# EAGLE board particle-can-v2.2 (EAGLE 7.5.0)
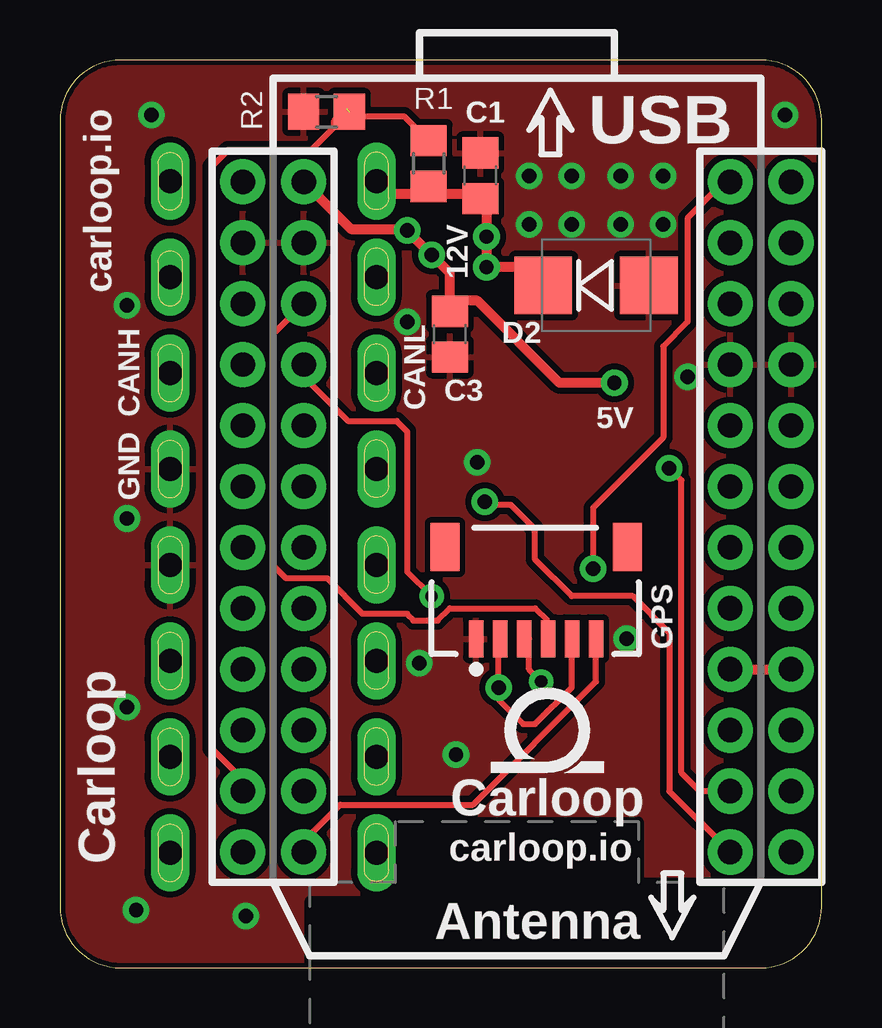
[diagram p0: board, top side]
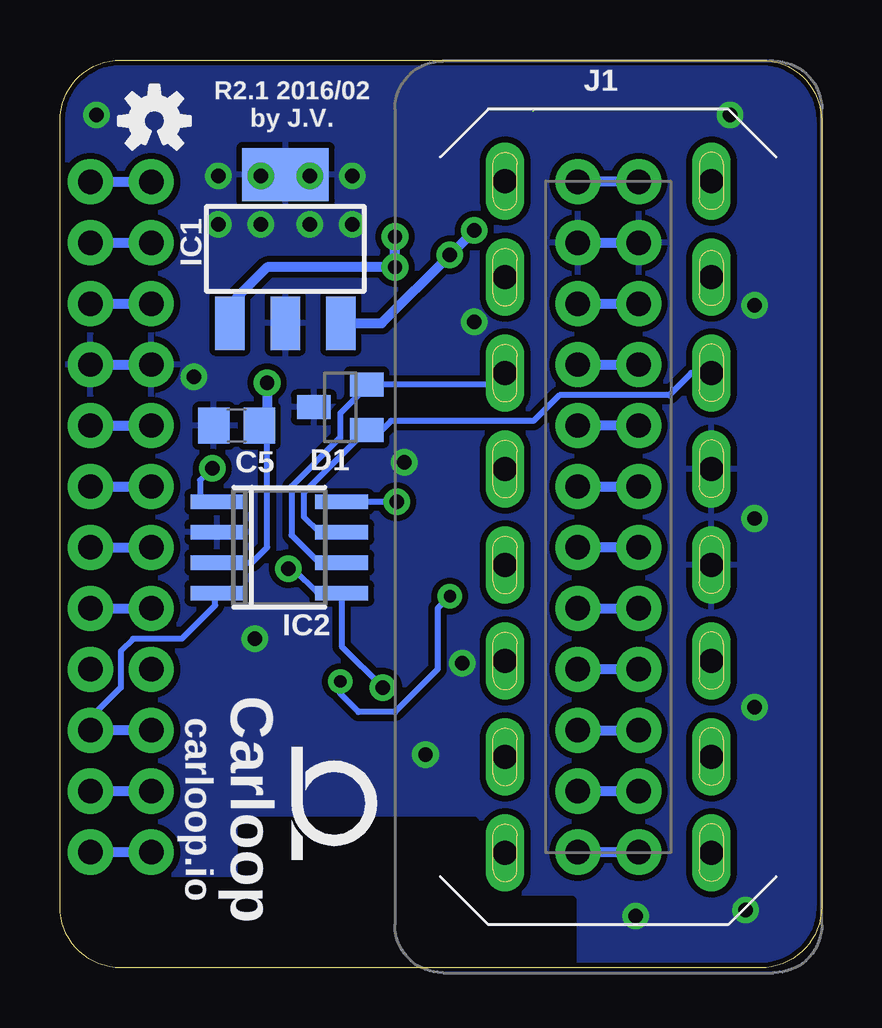
[diagram p1: board, bottom side, seen from below]

Size 31.75 x 37.85 mm. Coordinates in mm from the lower left corner, seen from the top.
Outline: 29.21,37.85 2.54,37.85 arc90 0,35.31 0,2.54 arc90 2.54,0 29.21,0 arc90 31.75,2.54 31.75,35.31 arc90 29.21,37.85
Copper layers (1*16): Top 0.035mm / dielectric 1.5mm / Bottom 0.035mm
Design rules "SparkFun *": minimum track width 8mil, minimum drill 20mil, track to track 10mil, track to pad 8mil, pad to pad 10mil, via to via 10mil, smd to smd 10mil, copper to edge 8mil, drill to drill 8mil, minimum pad ring 12mil, minimum via ring 10mil, stop-mask expansion 4mil, vias tented up to drill 45mil, thermal gap 10mil
Net classes: 0 default: width 0.254 mm; 1 power: width 0.813 mm, clearance 0.406 mm
tRestrict: area 10.4,-3 to 27.4,6.1
bRestrict: area 10.4,-3 to 27.4,6.1

## Footprints (pad centres in the part's own frame; a part is rotated, then mirrored left to right if it is on the bottom)
C0805 = smd 1.3 x 1.5: 1 -0.95,0; 2 0.95,0
PHOTON_STACKABLE_EXTERNAL = drill 1.016 pad 1.88: 1 1.27,32.258; 2 1.27,29.718; 3 1.27,27.178; 4 1.27,24.638; 5 1.27,22.098; 6 1.27,19.558; 7 1.27,17.018; 8 1.27,14.478; 9 1.27,11.938; 10 1.27,9.398; 11 1.27,6.858; 12 1.27,4.318; 13 19.05,4.318; 14 19.05,6.858; 15 19.05,9.398; 16 19.05,11.938; 17 19.05,14.478; 18 19.05,17.018; 19 19.05,19.558; 20 19.05,22.098; 21 19.05,24.638; 22 19.05,27.178; 23 19.05,29.718; 24 19.05,32.258; @1 -1.27,32.258; @2 -1.27,29.718; @3 -1.27,27.178; @4 -1.27,24.638; @5 -1.27,22.098; @6 -1.27,19.558; @7 -1.27,17.018; @8 -1.27,14.478; @9 -1.27,11.938; @10 -1.27,9.398; @11 -1.27,6.858; @12 -1.27,4.318; @13 21.59,4.318; @14 21.59,6.858; @15 21.59,9.398; @16 21.59,11.938; @17 21.59,14.478; @18 21.59,17.018; @19 21.59,19.558; @20 21.59,22.098; @21 21.59,24.638; @22 21.59,27.178; @23 21.59,29.718; @24 21.59,32.258
SOT23 = smd 1 x 1.4: 1 -0.95,-1.1; 2 0.95,-1.1; 3 0,1.1
SMB-DIODE = smd 2.4 x 2.4: A 2.2,0; C -2.2,0
JST-6-SMD-HOR-1.0MM = smd 0.6 x 1.55: 1 2.46,1.27; 2 1.46,1.27; 3 0.46,1.27; 4 -0.54,1.27; 5 -1.54,1.27; 6 -2.54,1.27 | smd 1.2 x 2: P$1 -3.84,-2.555; P$2 3.76,-2.555
SOT223 = smd 1.219 x 2.235: 1 -2.311,-3.099; 2 0,-3.099; 3 2.311,-3.099 | smd 3.6 x 2.2: 4 0,3.099
SO8 = smd 0.6 x 2.2: 1 -1.905,-2.6; 2 -0.635,-2.6; 3 0.635,-2.6; 4 1.905,-2.6; 5 1.905,2.6; 6 0.635,2.6; 7 -0.635,2.6; 8 -1.905,2.6
OBDII-STRAIGHT = drill 1 pad 1.5 long: 1 14,4.3; 2 10,4.3; 3 6,4.3; 4 2,4.3; 5 -2,4.3; 6 -6,4.3; 7 -10,4.3; 8 -14,4.3; 9 14,-4.3; 10 10,-4.3; 11 6,-4.3; 12 2,-4.3; 13 -2,-4.3; 14 -6,-4.3; 15 -10,-4.3; 16 -14,-4.3
R0805 = smd 1.3 x 1.5: 1 -0.95,0; 2 0.95,0

## Placement (x,y rotation side)
C1  .47u  [C0805]  17.53,33.02 90 top
C3  22u  [C0805]  16.26,26.42 270 top
C5  0.1u  [C0805]  24.38,22.61 0 bottom
CORE  PHOTONWITH_EXTERNAL_HEADERS  [PHOTON_STACKABLE_EXTERNAL]  8.89,0.51 0 top
D1  PESD1CAN  [SOT23]  20.07,23.37 90 bottom
D2  1SMB16CAT3G  [SMB-DIODE]  22.35,28.45 0 top
F2  [OSHW-LOGO-S]  27.81,35.31 0 bottom
GPS  JSTHORIZONTAL  [JST-6-SMD-HOR-1.0MM]  19.81,14.99 180 top
IC1  LM2940  [SOT223]  22.35,29.97 0 bottom
IC2  TJA1049  [SO8]  22.61,17.53 270 bottom
J1  OBDII  [OBDII-STRAIGHT]  8.89,18.8 270 bottom
R1  62k  [R0805]  15.37,33.53 270 top
R2  10k  [R0805]  11.11,35.69 0 top
U$1  LOGOSMALL  [CARLOOP-2]  20.32,9.91 0 top
U$5  LOGOSMALL  [CARLOOP-2]  20.32,6.86 270 bottom
ZDRAW1  [A4L-LOC]  -56.39,-51.94 0 top  (outside the outline)

## Library data of the parts
C1 = rcl; PARTNO: C0805C474K5RACTU
C3 = rcl; PARTNO: GRM219R61A226MEA0D
C5 = rcl; PARTNO: 08055C104KAT2A
CORE = MuniRent; BOM: EXCLUDE; PARTNO: *
D1 = MuniRent; PARTNO: PESD1CAN-215
D2 = BUG; PARTNO: 1SMB16CAT3G; ROLE: Overvoltage protection
F2 = SparkFun-Aesthetics
GPS = MuniRent; PARTNO: SM06B-SRSS-TB
IC1 = MuniRent; PARTNO: LM2940IMP-5.0/NOPB
IC2 = MuniRent; PARTNO: TJA1049T-118
J1 = MuniRent; PARTNO: OBD-II
R1 = rcl; PARTNO: ERJ-6ENF6202V
R2 = rcl; PARTNO: ERJ-6ENF1002V
U$1 U$5 = MuniRent; BOM: EXCLUDE
ZDRAW1 = frames

## Nets
3.3V: CORE.24 CORE.@24 GPS.2 GPS.5 IC2.5
5V: C3.1 C5.2 CORE.1 CORE.@1 IC1.3 IC2.3
+12V: C1.1 D2.C IC1.1 J1.16 R1.2
CANA_EN: CORE.13 CORE.@13 IC2.8
CANA_RX: CORE.15 CORE.@15 IC2.4
CANA_TX: CORE.14 CORE.@14 IC2.1
GND: C1.2 C3.2 C5.1 CORE.2 CORE.21 CORE.@2 CORE.@21 D1.3 D2.A GPS.1 IC1.2 IC1.4 IC2.2 J1.4 J1.5 R2.1
GPS_EN: CORE.12 CORE.@12 GPS.6
GPS_RX: CORE.3 CORE.@3 GPS.4
GPS_TX: CORE.4 CORE.@4 GPS.3
HSPD_HI: D1.1 IC2.7 J1.6
HSPD_LO: D1.2 IC2.6 J1.14
N$10: CORE.23 CORE.@23
N$11: CORE.22 CORE.@22
N$12: CORE.20 CORE.@20
N$13: CORE.19 CORE.@19
N$14: CORE.18 CORE.@18
N$15: CORE.17 CORE.@17
N$16: CORE.16 CORE.@16
N$19: CORE.10 CORE.@10
N$20: CORE.9 CORE.@9
N$23: CORE.8 CORE.@8
N$24: CORE.7 CORE.@7
N$25: CORE.6 CORE.@6
N$26: CORE.5 CORE.@5
VBAT: CORE.11 CORE.@11 R1.1 R2.2

## Tracks (layer width: path | path; a pad name or v marks a point on that pad's centre or on a via)
3.3V  (via drill 0.6)
  Top 0.254: CORE.24 27.69,32.77 26.16,31.24 26.16,26.92 25.15,25.91 25.15,22.1 22.22,19.18 v22.22,16.64 | 18.35,11.75 v18.29,11.68 | v18.29,11.68 18.29,13.72 GPS.2 | v18.29,11.68 18.29,11.18 19.3,10.16 19.81,10.16 21.34,11.68 21.34,13.72 GPS.5
  Bottom 0.254: IC2.5 21.02,15.62 22.04,16.64 v22.22,16.64 | 20.07,15.75 20.07,15.68 IC2.5 | IC2.5 20.01,13.4 v18.29,11.68
  Bottom 0.406: CORE.@24 CORE.24
5V  (via drill 0.6)
  Top 0.406: CORE.1 12.13,30.8 14.41,30.8 v15.49,29.72 16.26,28.96 C3.1 16.7,27.81 17.4,27.81 20.83,24.38 v23.11,24.38
  Bottom 0.254: IC2.3 23.75,16.89 23.11,17.53 23.11,22.93 C5.2
  Bottom 0.406: CORE.@1 CORE.1 | IC1.3 18.34,26.87 v15.49,29.72 v14.48,30.73 | v23.11,24.38 23.11,22.93
+12V  (via drill 0.6)
  Top 0.406: J1.16 13.73,32.26 14.99,32.26 15.31,32.58 R1.2 15.69,32.26 17.02,32.26 17.21,32.07 C1.1 17.71,32.07 17.78,32 v17.78,30.48 v17.78,29.21 19.3,29.21 19.56,28.96 19.56,28.45 D2.C
  Bottom 0.254: 24.38,27.1 24.43,27.1
  Bottom 0.406: 24.38,27.1 24.38,27.94 23.11,29.21 v17.78,29.21 v17.78,30.48 | 24.43,27.1 IC1.1
CANA_EN  (via drill 0.6)
  Top 0.254: CORE.13 25.4,7.37 25.4,13.97 23.88,15.49 21.34,15.49 19.81,17.02 19.81,18.29 18.8,19.3 17.78,19.3 17.72,19.37 v17.72,19.43
  Bottom 0.254: IC2.8 v17.72,19.43
  Bottom 0.406: CORE.@13 CORE.13
CANA_RX
  Bottom 0.254: CORE.@15 30.48,10.41 29.21,11.68 29.21,13.21 28.7,13.72 26.67,13.72 25.27,15.11 25.27,15.55 IC2.4
  Bottom 0.406: CORE.15 CORE.@15
CANA_TX  (via drill 0.6)
  Top 0.254: CORE.14 26.67,7.37 25.91,8.13 25.91,20.32 v25.4,20.83
  Bottom 0.254: v25.4,20.83 25.91,20.32 25.91,19.56 25.33,19.56 IC2.1
  Bottom 0.406: CORE.14 CORE.@14
GND  (via drill 0.6)
  Bottom 0.406: CORE.@21 CORE.21 | CORE.2 CORE.@2
  other vias: 25.15,33.02 21.34,33.02 19.56,33.02 19.56,30.99 21.34,30.99 23.37,30.99 25.15,30.99 23.37,33.02 14.48,26.92 14.99,12.7 16.51,8.89 23.62,13.72 2.79,27.62 2.79,18.73 2.79,10.86 17.4,21.08 26.16,24.64 30.23,35.56 3.81,35.56 7.75,2.16 3.17,2.41
  pour Top (rank 4): 29.21,37.85 2.54,37.85 arc90 0,35.31 0,2.54 arc90 2.54,0 29.21,0 arc90 31.75,2.54 31.75,35.31 arc90
  pour Bottom: 29.21,37.85 2.54,37.85 arc90 0,35.31 0,2.54 arc90 2.54,0 29.21,0 arc90 31.75,2.54 31.75,35.31 arc90
GPS_EN
  Top 0.254: CORE.12 10.16,5.33 10.22,5.33 11.68,6.79 17.21,6.79 22.35,11.94 GPS.6
  Bottom 0.406: CORE.12 CORE.@12
GPS_RX
  Top 0.254: CORE.3 8.89,26.42 8.89,16.76 9.41,16.24 11.12,16.24 12.6,14.77 14.48,14.77 14.48,14.73 14.73,14.48 15.75,14.48 16.26,14.99 19.81,14.99 20.32,14.48 20.32,13.72 GPS.4
  Bottom 0.406: CORE.3 CORE.@3
GPS_TX  (via drill 0.51)
  Top 0.254: CORE.4 10.16,24.64 12,22.8 14.03,22.8 14.48,22.35 14.48,16.51 v15.49,15.49 | v20.07,11.94 19.56,12.45 19.56,13.72 GPS.3
  Bottom 0.254: v20.07,11.94 20.07,11.43 19.3,10.67 17.78,10.67 16,12.45 16,14.99 v15.49,15.49
  Bottom 0.406: CORE.4 CORE.@4
HSPD_HI
  Bottom 0.254: J1.6 5.43,24.8 6.35,23.88 10.92,23.88 12,22.8 17.95,22.8 18.33,22.42 D1.1 | D1.1 18.97,22.19 19.05,22.1 | D1.1 21.57,19.81 21.59,19.81 21.59,18.8 20.95,18.16 IC2.7
HSPD_LO
  Bottom 0.254: D1.2 18.61,24.32 | IC2.6 20.13,16.76 20.83,16.76 22.1,18.03 22.1,20.07 20.07,22.1 20.07,23.11 18.97,24.21 D1.2 | J1.14 13.67,24.32 D1.2
N$10
  Bottom 0.406: CORE.@23 CORE.23
N$11
  Bottom 0.406: CORE.@22 CORE.22
N$12
  Bottom 0.406: CORE.@20 CORE.20
N$13
  Bottom 0.406: CORE.@19 CORE.19
N$14
  Bottom 0.406: CORE.@18 CORE.18
N$15
  Bottom 0.406: CORE.@17 CORE.17
N$16
  Top 0.406: CORE.16 CORE.@16
N$19
  Bottom 0.406: CORE.10 CORE.@10
N$20
  Bottom 0.406: CORE.@9 CORE.9
N$23
  Bottom 0.406: CORE.8 CORE.@8
N$24
  Bottom 0.406: CORE.@7 CORE.7
N$25
  Bottom 0.406: CORE.6 CORE.@6
N$26
  Bottom 0.406: CORE.@5 CORE.5
VBAT  (1 unrouted)
  Top 0.254: 11.94,35.81 11.43,35.31 11.43,35.05 10.46,34.09 9.3,34.09 9.14,34.09 7.01,34.09 6.32,33.4 6.32,9.14 7.47,8 7.47,7.57 7.62,7.42 CORE.@11 | 12.26,35.49 14.35,35.49 R1.1
  Top 0.406: R1.1 15.37,34.67 | 12.26,35.49 R2.2
  Bottom 0.406: CORE.@11 CORE.11

## Text on the board
tPlace: USB | carloop.io | 12V | CANH | CANL | GND | 5V | Carloop | Carloop | carloop.io | Antenna
bPlace: R2.1 2016/02 / by J.V. | Carloop | carloop.io
Document: NOTES: | Revision 2.1 | Julien Vanier | jvanier@gmail.com